# Altium PCB PCB File.PcbDoc
Units mm, origin at the board's own origin, x right, y up, seen from the top; angles counter-clockwise.
Board outline 82.74 x 78.96 mm, 2 copper layers (Top Layer, Bottom Layer); 26 components, 19 nets, 74 pads, 1 vias.
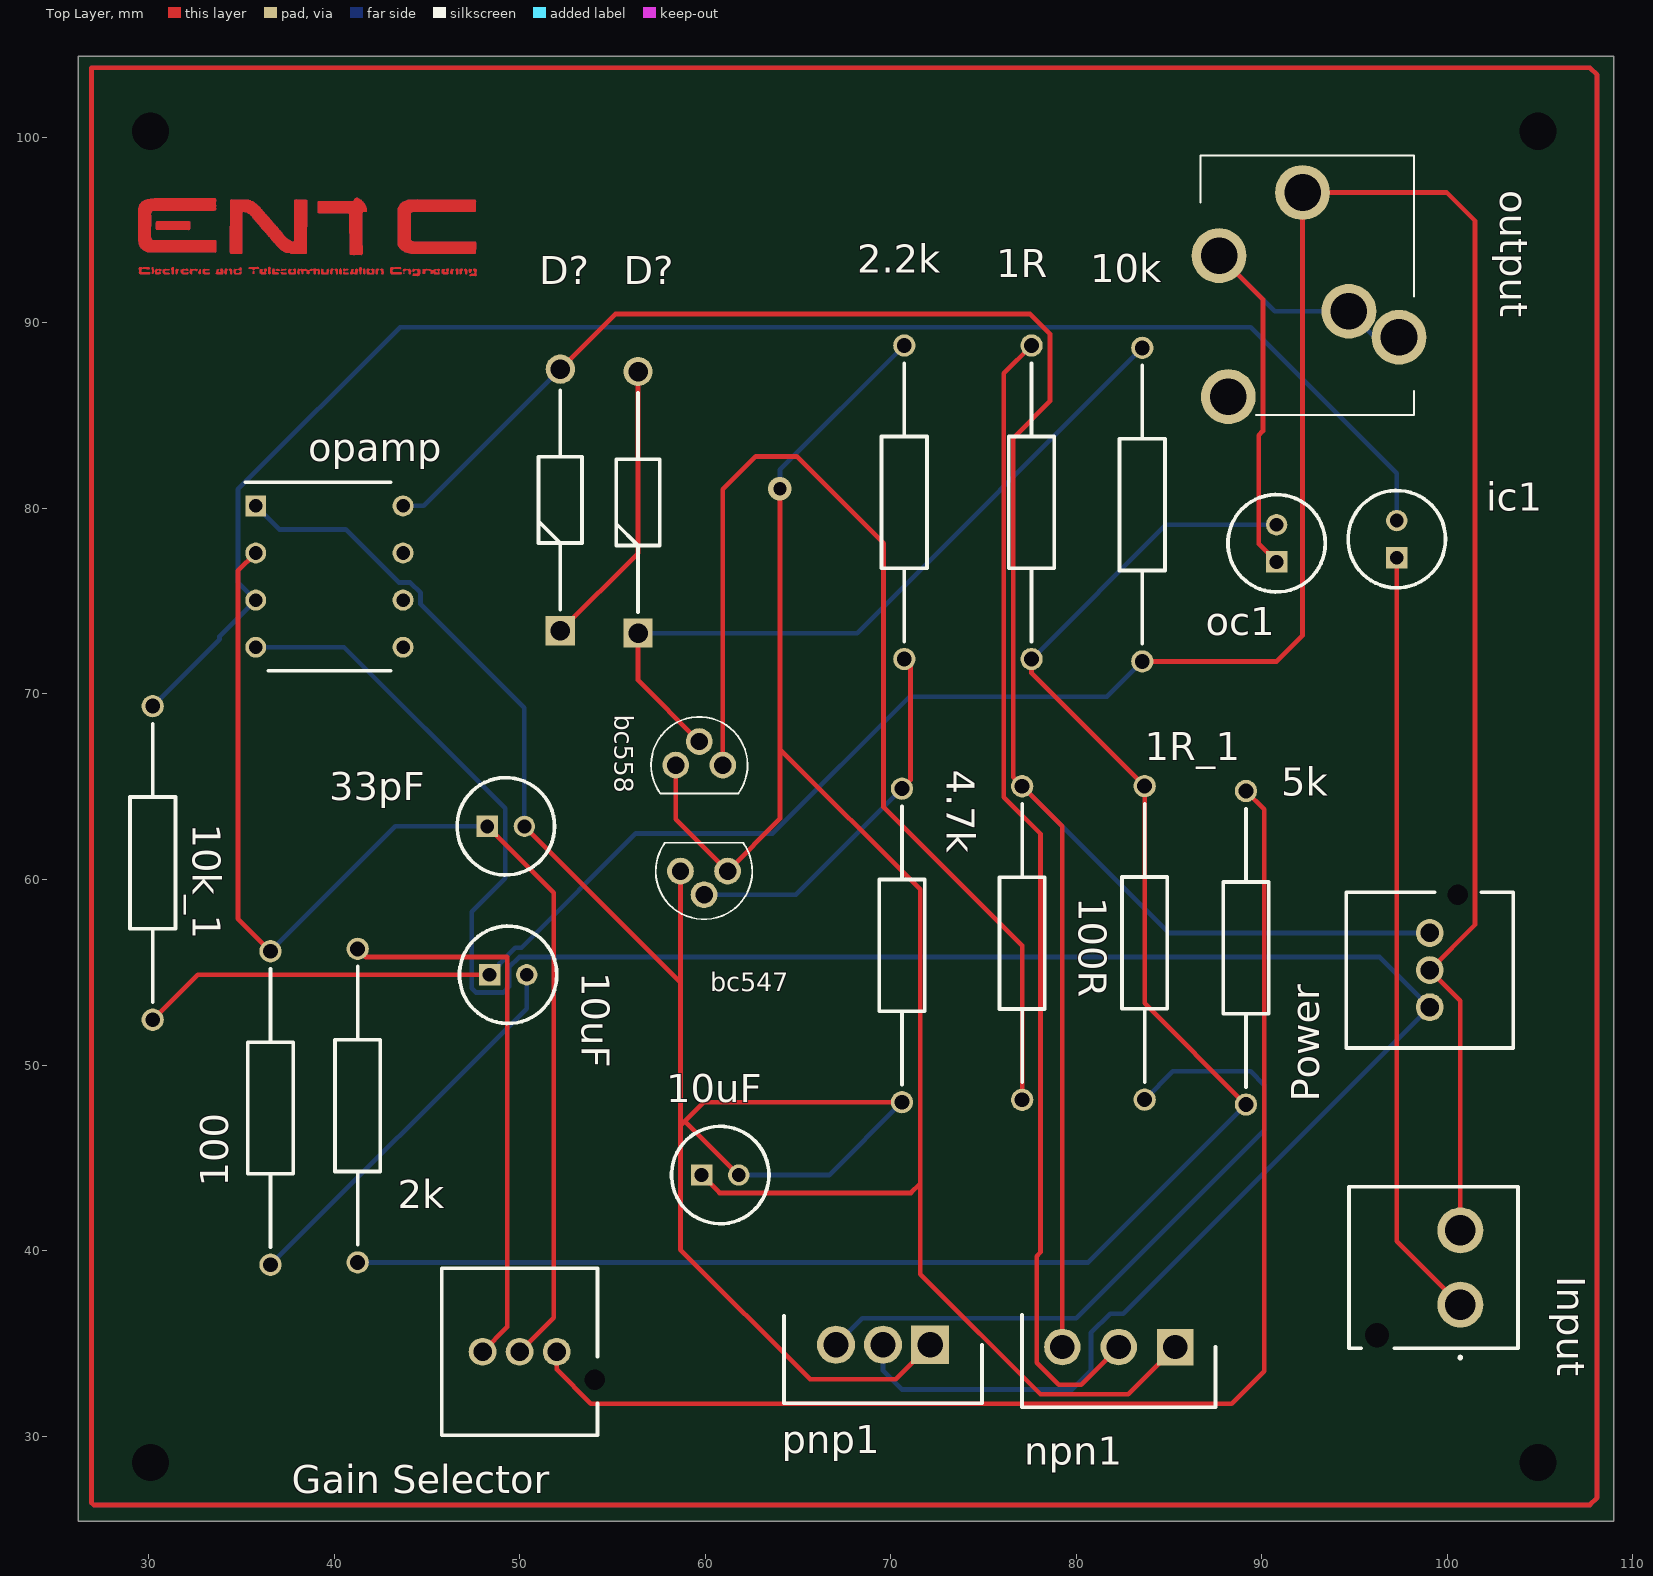
[diagram p0: Top Layer view]
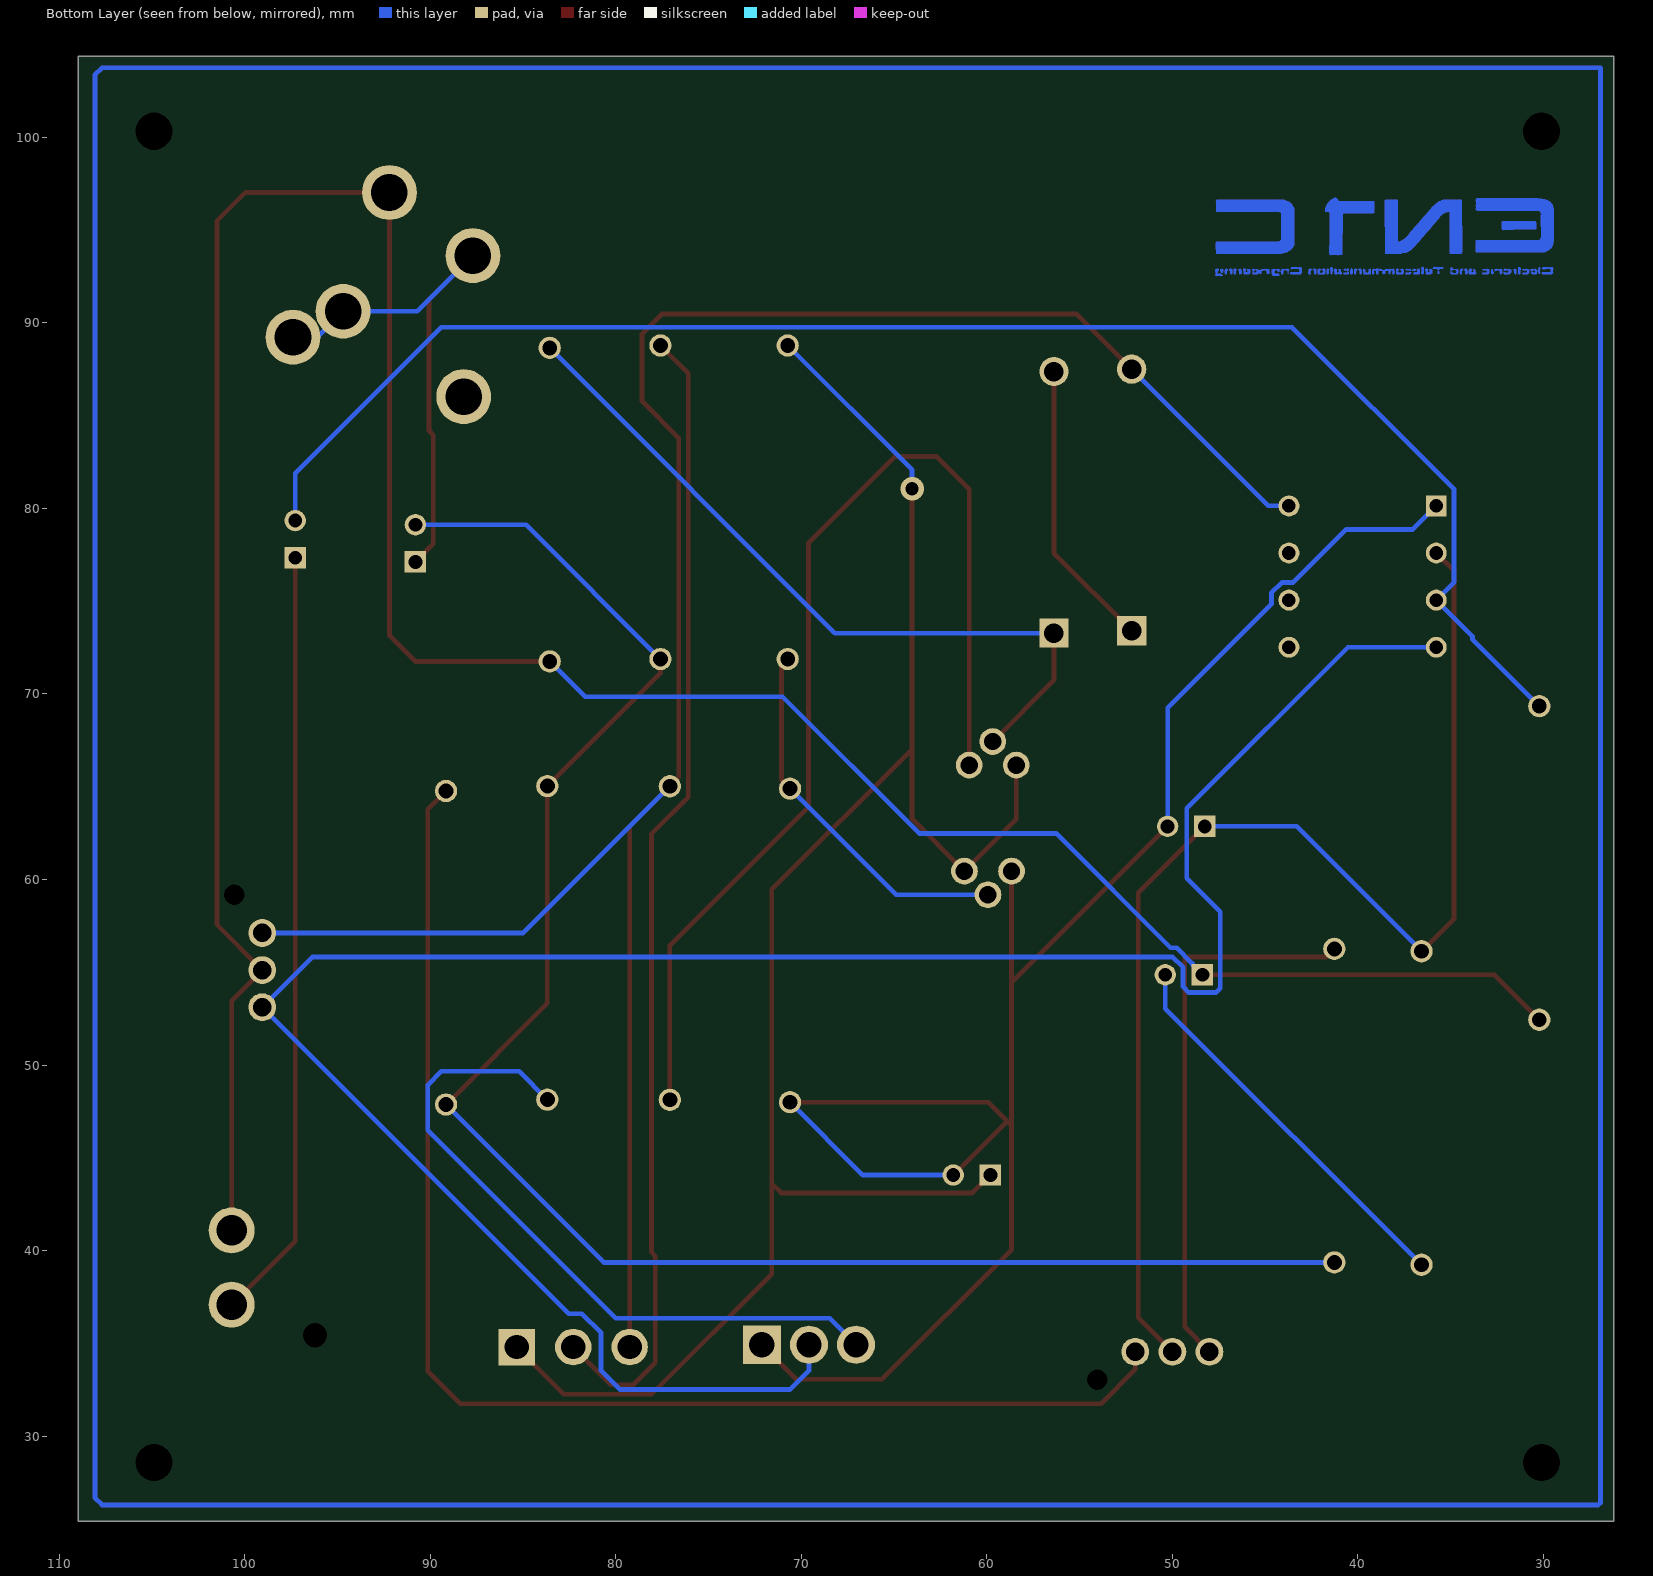
[diagram p1: Bottom Layer view, seen from below]
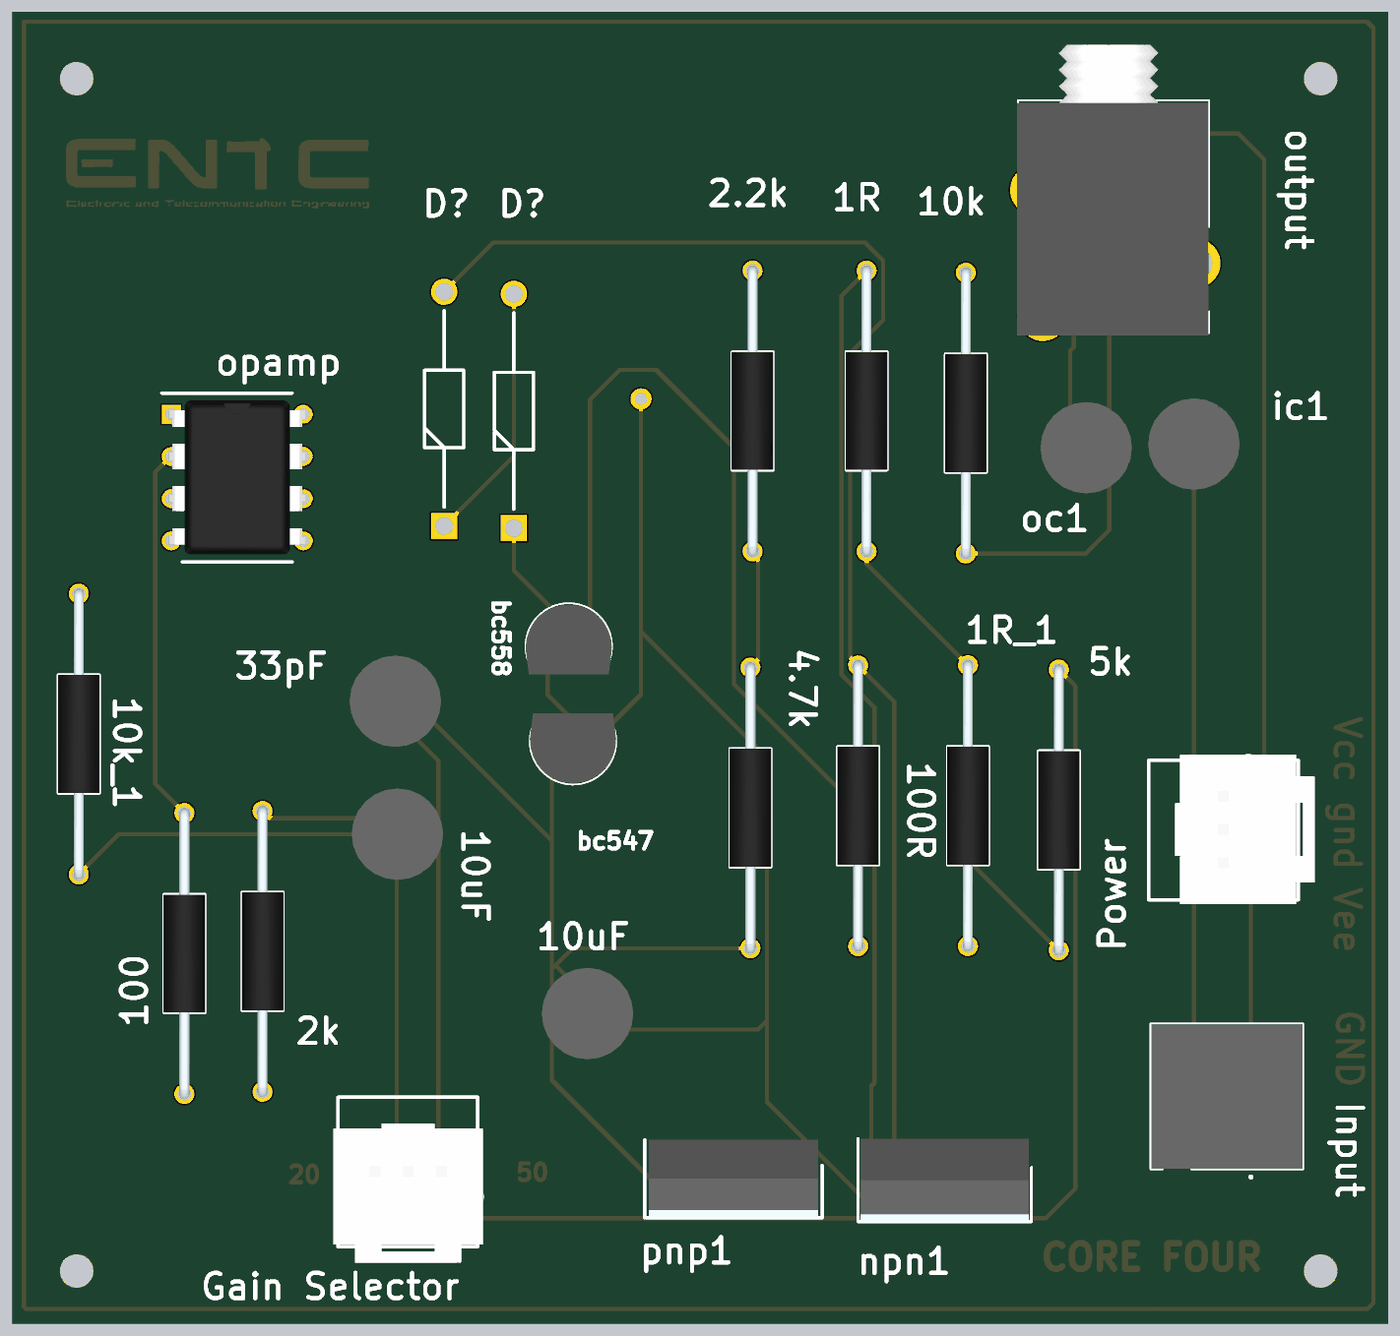
[diagram p2: 3D render of the assembled board from above, using the file's embedded part models]

## Layer stack, top to bottom
Top Solder: solder mask 0.0102, Solder Resist, Dk 3.5
Top Layer: signal copper 0.0356
Dielectric 1: dielectric 0.32, FR-4, Dk 4.8
Bottom Layer: signal copper 0.0356
Bottom Solder: solder mask 0.0102, Solder Resist, Dk 3.5

## Board outline
26.226,25.4 108.966,25.4 108.966,104.361 26.226,104.361

## Design rules (kind name [scope] priority, off if disabled: settings)
Clearance [All] p1: gap=0.254 ignorepadtopadclearanceinfootprint=FALSE except(0: Arc-Hole Track-Hole SMDPad-Hole THPad-Hole Via-Hole Fill-Hole Poly-Hole Region-Hole Text-Hole)
PolygonConnect [All] p1: connectstyle=Relief reliefconductorwidth=0.254 reliefentries=4 polygonreliefangle="90 Angle" airgapwidth=0.254
RoutingVias [All] p1: holewidth=0.711 width=1.27 viastyle="Through Hole" minholewidth=0.711 minwidth=1.27 maxholewidth=0.711 maxwidth=1.27
SolderMaskExpansion [All] p1: expansion=0.102 istentingtop=FALSE
Width [All] p1: maxlimit=0.254 minlimit=0.254 preferedwidth=0.254
30 further rules are at their usual default settings.

## Classes and differential pairs
component class Sheet1: 1R 1R_1 2.2k 2k 4.7k 5k 10k 10k_1 10uF 33pF 100 100R bc547 bc558 D? "Gain Selector" Input npn1 oc1 opamp output pnp1 Power

## Components (designator, comment, footprint, x,y, rotation, side; value= is the part's Value field where it differs from the comment)
1R "H810KBYA" RESAD1690W60L710D245 77.597,71.882 r90 top
1R_1 "H810KBYA" RESAD1690W60L710D245 83.693,48.133 r90 top
2.2k "H810KBYA" RESAD1690W60L710D245 70.739,71.882 r90 top
2k "H810KBYA" RESAD1690W60L710D245 41.275,39.361 r90 top
4.7k "H810KBYA" RESAD1690W60L710D245 70.612,47.997 r90 top
5k "H810KBYA" RESAD1690W60L710D245 89.154,47.87 r90 top
10k "H810KBYA" RESAD1690W60L710D245 83.566,71.755 r90 top
10k_1 "H810KBYA" RESAD1690W60L710D245 30.226,52.442 r90 top
10uF "ECA-1HHG100" CAPPRD200W55D525H1200 48.387,54.864 r0 top
10uF "ECA-1HHG100" CAPPRD200W55D525H1200 59.817,44.069 r0 top
33pF "ECA-1HHG100" CAPPRD200W55D525H1200 48.26,62.865 r0 top
100 "H810KBYA" RESAD1690W60L710D245 36.576,39.234 r90 top
100R "H810KBYA" RESAD1690W60L710D245 77.089,48.124 r90 top
bc547 "BC547BG" TO-92_(TO-226) 61.214,60.452 r0 top
bc558 "BC547BG" TO-92_(TO-226) 58.42,66.167 r180 top
D? "IN4007" DIOAD1405W86L465D235 52.197,73.406 r90 top
D? "IN4007" DIOAD1405W86L465D235 56.388,73.279 r90 top
"Gain Selector" "B03B-JWPF-SK-R_LF__SN_" B03BJWPFSKRLFSN 52.006,34.544 r180 top
ic1 "ECA-1HHG100" CAPPRD200W55D525H1200 97.282,77.343 r90 top
Input "B02B-PSIY-B1___LF__SN_" B02BPSIYB1LFSN 100.711,37.084 r270 top
npn1 "TIP41A" TO304P498X1010X2089-3P 85.336,34.798 r180 top
oc1 "ECA-1HHG100" CAPPRD200W55D525H1200 90.805,77.121 r90 top
opamp "NE5532P" DIP794W53P254L959H508Q8N 39.751,76.327 r0 top
output "35RAPC4BH3" 35RAPC4BH3 92.202,97.028 r270 top (schematic designator OUTPUT)
pnp1 "TIP42C" TO254P470X1016X2019-3P 72.126,34.925 r180 top
Power "B03B-JWPF-SK-R_LF__SN_" B03BJWPFSKRLFSN 99.06,57.118 r270 top

## Footprints (in the part's own frame and the unit in brackets; to place one, negate y for a bottom-side part, rotate by r counter-clockwise, add the part's x,y. Pads: shape width x height; smd on the part's side, far side on the other; paste and mask are expansions set on the pad)
35RAPC4BH3 [mm]
  round 2.955 hole 1.97: 1(0,0) 2(7.8,5.2) 3(6.4,2.5) 4(11,-4) 5(3.4,-4.5)
  silkscreen extent -2,-5.5 12,6, body extent -5.34,-5.55 12.16,5.95, height 6.1
B02BPSIYB1LFSN [mm]
  round 2.475 hole 1.65: 1(0,0) 2(-4,0)
  round 0.65 hole 1.3 unplated: MH1(1.65,-4.5)
  silkscreen extent -6.35,-6 2.9,3.1, body extent -6.35,-6 2.35,3.1, height 12.45
B03BJWPFSKRLFSN [mm]
  round 1.5 hole 1: 1(0,0) 2(2,0) 3(4,0)
  round 0.55 hole 1.1 unplated: MH1(-2.05,1.5)
  silkscreen extent -2.2,-4.5 6.2,4.5, body extent -2.53,-2.92 6.47,5.48, height 16.58
CAPPRD200W55D525H1200 [mm]
  rect 1.15x1.15 hole 0.75: 1(0,0)
  round 1.15 hole 0.75: 2(2,0)
  silkscreen extent -1.62,-2.62 3.63,2.62, body extent -1.74,-2.75 3.75,2.75, height 12
DIOAD1405W86L465D235 [mm]
  rect 1.575x1.575 hole 1.05: 1(0,0)
  round 1.575 hole 1.05: 2(14.1,0)
  silkscreen extent 1.14,-1.18 12.96,1.18, body extent 0,0 0,0
DIP794W53P254L959H508Q8N [mm]
  rect 1.13x1.13 hole 0.73: 1(-3.97,3.81)
  round 1.13 hole 0.73: 2(-3.97,1.27) 3(-3.97,-1.27) 4(-3.97,-3.81) 5(3.97,-3.81) 6(3.97,-1.27) 7(3.97,1.27) 8(3.97,3.81)
  silkscreen extent -4.54,-5.08 3.3,5.08, body extent -4.1,-4.64 4.1,4.64, height 4.21
RESAD1690W60L710D245 [mm]
  round 1.2 hole 0.8: 1(0,0) 2(16.9,0)
  silkscreen extent 0.95,-1.22 15.95,1.22, body extent -0.3,-1.24 17.2,1.24, height 2.5
TO254P470X1016X2019-3P [mm]
  rect 2.055x2.055 hole 1.37: 1(0,0)
  round 2.055 hole 1.37: 2(2.535,0) 3(5.07,0)
  silkscreen extent -2.8,-1.55 7.87,3.15, body extent -2.55,-1.55 7.61,3.15, height 18.54
TO304P498X1010X2089-3P [mm]
  rect 1.965x1.965 hole 1.31: 1(0,0)
  round 1.965 hole 1.31: 2(3.04,0) 3(6.08,0)
  silkscreen extent -2.17,-1.74 8.25,3.25, body extent -2.01,-1.74 8.09,3.24, height 19.12
TO-92_(TO-226) [mm]
  round 1.44 hole 0.94: 1(0,0) 2(-1.27,-1.27) 3(-2.54,0)
  silkscreen extent -3.87,-2.6 1.33,1.53, body extent -3.87,-2.51 1.33,1.68, height 8.33

## Part data
1R 1R_1 2.2k 2k 4.7k 5k 10k 10k_1 100 100R: "Resistor", Manufacturer_Name="TE Connectivity", Mouser Part Number=279-H810KBYA, Arrow Part Number=H810KBYA, Arrow Price/Stock=https://www.arrow.com/en/products/h810kbya/te-connectivity, Datasheet Link=https://datasheet.datasheetarchive.com/originals/distributors/DKDS-21/401710.pdf, Manufacturer_Part_Number=H810KBYA, Mouser Price/Stock=https://www.mouser.com/Search/Refine.aspx?Keyword=279-H810KBYA
10uF 10uF 33pF ic1 oc1: "Capacitor Polarised", Manufacturer_Name=Panasonic, Mouser Part Number=667-ECA-1HHG100, Arrow Part Number=ECA-1HHG100, Arrow Price/Stock=https://www.arrow.com/en/products/eca-1hhg100/panasonic?region=europe, Datasheet Link=http://industrial.panasonic.com/cdbs/www-data/pdf/RDF0000/ABA0000C1215.pdf, Height=12mm, Manufacturer_Part_Number=ECA-1HHG100, Mouser Price/Stock=https://www.mouser.co.uk/ProductDetail/Panasonic/ECA-1HHG100?qs=86KMePBwEH059%252B7I%2FwBMgA%3D%3D
bc547 bc558: "Transistor BJT NPN", Manufacturer_Name=onsemi, Mouser Part Number=N/A, Arrow Part Number=BC547BG, Arrow Price/Stock=http://www.arrow.com/en/products/bc547bg/on-semiconductor, Datasheet Link=https://datasheet.datasheetarchive.com/originals/distributors/Datasheets-23/DSA-455923.pdf, Height=5.33mm, Manufacturer_Part_Number=BC547BG, Mouser Price/Stock=http://www.mouser.com/Search/ProductDetail.aspx?qs=NSmgnqlvnz5NIKIycfR5CQ%3d%3d
D? D?: "Diode", Manufacturer_Name=onsemi, Manufacturer_Part_Number=IN4007
"Gain Selector" Power: "Connector", Manufacturer_Name="JST (JAPAN SOLDERLESS TERMINALS)", Manufacturer_Part_Number=B03B-JWPF-SK-R(LF)(SN), Datasheet Link=https://datasheet.datasheetarchive.com/originals/dk/DKDS-13/257039.pdf, Height=16.6mm
Input: "Connector", Manufacturer_Name="JST (JAPAN SOLDERLESS TERMINALS)", Manufacturer_Part_Number="B02B-PSIY-B1  (LF)(SN)", Datasheet Link=https://www.jst-mfg.com/product/pdf/eng/ePSI.pdf?60f75cd026c21, Height=12.35mm
npn1: "Transistor", Manufacturer_Name=MOSPEC, Datasheet Link=http://www.mospec.com.tw/pdf/power/TIP41.pdf, Height=4.98mm, Manufacturer_Part_Number=TIP41A
opamp: "Integrated Circuit", Manufacturer_Name="Texas Instruments", Mouser Part Number=595-NE5532P, Arrow Part Number=NE5532P, Arrow Price/Stock=https://www.arrow.com/en/products/ne5532p/texas-instruments?region=nac, Datasheet Link=http://www.ti.com/lit/ds/symlink/ne5532a.pdf, Height=5.08mm, Manufacturer_Part_Number=NE5532P, Mouser Price/Stock=https://www.mouser.co.uk/ProductDetail/Texas-Instruments/NE5532P?qs=3pnr37ZAbK%252Bre0OAHDmGsw%3D%3D
output: "Switch", Manufacturer_Name=Switchcraft, Mouser Part Number=502-35RAPC4BH3, Arrow Part Number=35RAPC4BH3, Arrow Price/Stock=https://www.arrow.com/en/products/35rapc4bh3/switchcraft, Datasheet Link=http://www.switchcraft.com/Drawings/35rapc__h3_cd.pdf, Height=6mm, Manufacturer_Part_Number=35RAPC4BH3, Mouser Price/Stock=https://www.mouser.co.uk/ProductDetail/Switchcraft/35RAPC4BH3?qs=I3kMT7EEIOWFGyk5rynRAQ%3D%3D
pnp1: "Transistor BJT PNP", Manufacturer_Name=onsemi, Mouser Part Number=512-TIP42C, Arrow Part Number=TIP42C, Arrow Price/Stock=https://www.arrow.com/en/products/tip42c/on-semiconductor, Datasheet Link=http://www.mouser.com/ds/2/149/TIP42C-890174.pdf, Height=4.7mm, Manufacturer_Part_Number=TIP42C, Mouser Price/Stock=https://www.mouser.co.uk/ProductDetail/onsemi-Fairchild/TIP42C?qs=cnIeywgme7b7B3r0xPyyBQ%3D%3D

## Free pads (board coordinates)
  round 1.524 hole 2: 8(104.902,100.33) 9(30.099,100.33) 10(104.902,28.575) 11(30.099,28.575)

## Via types
v1: diameter 1.27, hole 0.711, Top Layer to Bottom Layer, 1 vias

## Nets (pads, with @x,y where several pads share a name; then routed paths per layer and width w, separated by ;. In a path a pad name is that pad's centre, name@x,y a point inside that pad or via, vN(x,y) a via of type N, cw(c..) or ccw(c..) an arc to the next point about the centre after c; other vN are vias at no path point)
GND: 10k.1 10k_1.1 10uF.1@48.387,54.864 Input.2 output.1 Power.2 | length 160.5
  Top Layer w0.254: 10k_1.1 32.648,54.864 10uF.1@48.387,54.864 ; 10k.1 90.805,71.755 92.202,73.152 output.1 99.974,97.028 101.498,95.504 101.498,57.556 Power.2 100.711,53.467 Input.2
  Bottom Layer w0.254: 10uF.1@48.387,54.864 48.923,55.4 48.923,55.47 49.781,56.328 50.105,56.328 56.261,62.484 63.652,62.484 71.018,69.85 81.661,69.85 10k.1
input: ic1.1 Input.1 | length 41.7
  Top Layer w0.254: ic1.1 97.282,40.513 Input.1
Net1R_1: 1R.1 1R_1.2 2k.1 5k.1 oc1.2 | length 96.4
  Top Layer w0.254: 1R.1 77.597,71.129 1R_1.2 83.693,53.331 5k.1
  Bottom Layer w0.254: 2k.1 80.645,39.361 5k.1 ; 1R.1 84.836,79.121 oc1.2
Net1R_1_1: 1R_1.1 pnp1.3 | length 37.7
  Bottom Layer w0.254: pnp1.3 68.478,36.347 80.01,36.347 90.145,46.482 90.145,48.92 89.408,49.657 85.217,49.657 1R_1.1
Net1R_2: 1R.2 npn1.2 | length 62.1
  Top Layer w0.254: 1R.2 76.098,87.283 76.098,64.44 78.08,62.459 78.08,39.903 77.876,39.7 77.876,33.96 79.07,32.766 80.264,32.766 npn1.2
Net2.2k_1: 2.2k.1 4.7k.2 bc547.2 | length 20.3
  Top Layer w0.254: 4.7k.2 71.069,65.354 71.069,71.552 2.2k.1
  Bottom Layer w0.254: bc547.2 64.897,59.182 4.7k.2
Net2.2k_2: 2.2k.2 10uF.1@59.817,44.069 bc547.1 bc558.1 npn1.1 | length 100.4
  Top Layer w0.254: bc558.1 58.42,63.246 bc547.1 64.033,63.271 64.033,67.031 ; 10uF.1@59.817,44.069 60.782,43.104 71.095,43.104 71.603,43.612 ; v1(64.033,81.06) 64.033,67.031 ; npn1.1 82.796,32.258 78.08,32.258 71.603,38.735 71.603,43.612 ; 64.033,67.031 71.603,59.461 71.603,43.612
  Bottom Layer w0.254: v1(64.033,81.06) 64.033,82.076 2.2k.2
Net2k_2: 2k.2 "Gain Selector.3" | length 30.1
  Top Layer w0.254: 2k.2 41.716,55.82 49.343,55.82 49.343,35.881 48.006,34.544
Net4.7k_1: 4.7k.1 10uF.2@61.817,44.069 33pF.2 bc547.3 opamp.1 pnp1.1 | length 102.1
  Top Layer w0.254: 33pF.2 58.674,54.451 ; bc547.3 58.674,54.451 ; 10uF.2@61.817,44.069 58.912,46.974 ; 4.7k.1 59.935,47.997 58.912,46.974 ; pnp1.1 70.272,33.071 65.659,33.071 58.674,40.056 58.674,46.736 ; 58.674,46.736 58.674,54.451 ; 58.674,46.736 58.912,46.974
  Bottom Layer w0.254: opamp.1 37.051,78.867 40.64,78.867 43.504,76.003 44.113,76.003 44.667,75.449 44.667,74.84 50.26,69.247 33pF.2 ; 10uF.2@61.817,44.069 66.684,44.069 4.7k.1
Net5k_2: 5k.2 "Gain Selector.1" | length 72.3
  Top Layer w0.254: 52.006,34.544 52.006,33.592 53.848,31.75 88.392,31.75 90.145,33.503 90.145,63.779 5k.2
Net10k_1_2: 10k_1.2 ic1.2 opamp.3 | length 86.3
  Bottom Layer w0.254: 10k_1.2 33.833,72.949 33.833,73.109 opamp.3 34.823,76.015 34.823,81.026 43.561,89.764 89.408,89.764 97.282,81.89 ic1.2
Net10k_2: 10k.2 bc558.2 D?.1@56.388,73.279 | length 40.8
  Top Layer w0.254: D?.1@56.388,73.279 56.388,70.739 bc558.2
  Bottom Layer w0.254: D?.1@56.388,73.279 68.19,73.279 10k.2
Net10uF_2: 10uF.2@50.387,54.864 100.1 | length 21.4
  Bottom Layer w0.254: 100.1 50.387,53.045 10uF.2@50.387,54.864
Net33pF_1: 33pF.1 100.2 "Gain Selector.2" opamp.2 | length 67.6
  Top Layer w0.254: opamp.2 34.823,76.639 34.823,57.887 100.2 ; 33pF.1 51.851,59.274 51.851,36.389 50.006,34.544
  Bottom Layer w0.254: 100.2 43.307,62.865 33pF.1
Net100R_1: 100R.1 bc558.3 | length 59.3
  Top Layer w0.254: bc558.3 60.96,81.026 62.738,82.804 64.948,82.804 69.621,78.13 69.621,63.906 77.089,56.439 100R.1
NetD?_1: D?.1@52.197,73.406 D?.2@56.388,87.379 | length 15.7
  Top Layer w0.254: D?.1@52.197,73.406 56.388,77.597 D?.2@56.388,87.379
output: oc1.1 output.2 output.3 output.5 | length 29.5
  Top Layer w0.254: output.5 90.068,91.262 90.068,84.176 89.84,83.947 89.84,78.086 oc1.1
  Bottom Layer w0.254: output.5 90.702,90.628 output.3 96.102,89.228 output.2
VCC: 100R.2 D?.2@52.197,87.506 npn1.3 opamp.8 Power.1 | length 121.4
  Top Layer w0.254: D?.2@52.197,87.506 55.166,90.475 77.521,90.475 78.588,89.408 78.588,85.776 76.606,83.795 76.606,65.507 100R.2 79.256,62.857 npn1.3
  Bottom Layer w0.254: opamp.8 44.828,80.137 D?.2@52.197,87.506 ; 100R.2 84.995,57.118 Power.1
Vee: opamp.4 pnp1.2 Power.3 | length 122.7
  Bottom Layer w0.254: opamp.4 40.538,72.517 49.225,63.83 49.225,60.071 47.422,58.268 47.422,54.14 47.654,53.908 49.12,53.908 49.431,54.219 49.431,55.26 49.991,55.82 96.358,55.82 Power.3 82.543,36.601 81.839,36.601 80.797,35.56 80.797,33.528 79.781,32.512 70.607,32.512 69.591,33.528 pnp1.2
pads on no net: "Gain Selector.MH1" Input.MH1 opamp.5 opamp.6 opamp.7 output.4 Power.MH1

## Other copper
Multi-Layer:
  region: 47.276,92.736 47.261,92.792 47.271,92.864 47.307,92.91 47.419,92.9 47.435,92.884 47.424,92.843 47.358,92.705 47.296,92.715 47.281,92.731
  region: 32.82,92.838 32.815,92.741 32.825,92.71 32.815,92.649 32.769,92.634 32.728,92.644 32.708,92.664 32.692,92.669 32.682,92.71 32.692,92.731 32.723,92.802 32.733,92.843 32.764,92.894 32.8,92.9 32.815,92.884 32.825,92.843
  region: 40.202,92.761 40.212,92.72 40.202,92.649 40.176,92.623 40.125,92.634 40.11,92.649 40.099,92.69 40.11,92.731 40.099,92.782 40.079,92.802 40.069,92.823 40.038,92.853 40.043,92.889 40.063,92.9 40.094,92.91 40.135,92.92 40.186,92.9 40.202,92.884 40.212,92.843 40.202,92.772
  region: 43.757,92.654 43.741,92.669 43.752,92.72 43.767,92.726 43.793,92.71 43.798,92.674 43.787,92.654 43.767,92.654
  region: 46.601,92.634 46.585,92.649 46.575,92.69 46.585,92.761 46.57,92.818 46.565,92.884 46.601,92.92 46.662,92.91 46.688,92.884 46.698,92.813 46.703,92.674 46.688,92.639 46.672,92.623 46.637,92.618 46.606,92.628
  region: 37.276,92.71 37.419,92.7 37.439,92.68 37.429,92.628 37.383,92.613 37.291,92.623 37.26,92.613 37.178,92.623 37.153,92.649 37.132,92.72 37.148,92.736 37.24,92.726 37.271,92.715
  region: 36.907,92.802 36.877,92.833 36.872,92.859 36.892,92.889 36.964,92.91 37.035,92.9 37.051,92.884 37.071,92.833 37.066,92.807 37.025,92.797 36.912,92.797
  region: 37.184,92.802 37.168,92.797 37.143,92.813 37.153,92.874 37.189,92.91 37.347,92.905 37.393,92.91 37.429,92.884 37.419,92.853 37.404,92.838 37.296,92.843 37.209,92.807 37.189,92.807
  region: 40.708,92.91 40.759,92.9 40.774,92.884 40.764,92.853 40.749,92.838 40.641,92.843 40.606,92.818 40.555,92.787 40.514,92.797 40.498,92.843 40.509,92.884 40.534,92.91 40.575,92.92 40.647,92.9 40.698,92.91
  region: 46.176,92.669 46.166,92.649 46.14,92.623 46.002,92.628 45.915,92.623 45.885,92.634 45.818,92.669 45.808,92.71 45.798,92.853 45.834,92.889 45.874,92.9 45.956,92.889 45.982,92.864 45.972,92.833 45.941,92.782 45.951,92.751 45.967,92.736 46.007,92.726 46.059,92.736 46.084,92.751 46.074,92.792 46.053,92.813 46.033,92.853 46.079,92.91 46.12,92.92 46.171,92.91 46.186,92.894 46.197,92.853 46.186,92.813 46.166,92.792 46.156,92.772 46.146,92.741 46.176,92.68
  region: 29.69,92.623 29.557,92.613 29.506,92.644 29.49,92.69 29.48,92.741 29.49,92.772 29.485,92.94 29.495,92.981 29.516,93.002 29.557,93.012 29.639,93.002 29.679,92.981 29.71,92.992 30.053,92.997 30.073,92.946 30.063,92.915 30.048,92.9 30.007,92.889 29.905,92.9 29.72,92.91 29.669,92.93 29.613,92.874 29.603,92.833 29.613,92.761 29.649,92.726 29.905,92.736 30.068,92.726 30.084,92.71 30.094,92.669 30.078,92.634 30.027,92.613 29.802,92.623 29.7,92.623
  region: 42.667,92.853 42.672,92.664 42.647,92.628 42.58,92.623 42.555,92.649 42.56,92.767 42.519,92.828 42.493,92.853 42.498,92.889 42.519,92.9 42.549,92.91 42.59,92.92 42.642,92.9 42.657,92.884 42.667,92.864
  region: 36.467,92.802 36.457,92.905 36.467,92.986 36.483,93.012 36.524,93.022 36.56,93.007 36.58,92.935 36.575,92.838 36.58,92.68 36.549,92.628 36.503,92.613 36.467,92.639 36.457,92.68 36.467,92.792
  region: 42.365,92.644 42.335,92.613 42.284,92.623 42.258,92.649 42.248,92.69 42.258,92.874 42.304,92.92 42.386,92.91 42.432,92.874 42.422,92.853 42.376,92.797 42.36,92.751 42.37,92.68 42.37,92.649
  region: 39.608,92.823 39.598,92.853 39.629,92.905 39.685,92.91 39.721,92.874 39.731,92.813 39.721,92.782 39.7,92.659 39.685,92.634 39.613,92.613 39.572,92.623 39.393,92.618 39.352,92.628 39.322,92.659 39.301,92.741 39.312,92.884 39.337,92.91 39.409,92.9 39.424,92.853 39.419,92.777 39.439,92.726 39.511,92.695 39.562,92.705 39.598,92.741 39.608,92.782 39.608,92.813
  region: 40.37,92.93 40.396,92.905 40.416,92.823 40.406,92.659 40.381,92.623 40.34,92.613 40.289,92.644 40.278,92.685 40.273,92.69 40.283,92.72 40.294,92.792 40.289,92.859 40.299,92.9 40.324,92.935 40.36,92.94 40.365,92.935
  region: 31.567,92.731 31.557,92.639 31.531,92.613 31.49,92.623 31.465,92.649 31.46,92.705 31.465,92.782 31.454,92.813 31.465,92.874 31.49,92.9 31.531,92.91 31.613,92.9 31.639,92.874 31.593,92.818 31.567,92.761 31.567,92.741
  region: 33.864,92.838 33.859,92.864 33.905,92.91 33.966,92.92 34.012,92.884 34.022,92.843 34.017,92.736 34.022,92.68 33.992,92.628 33.946,92.613 33.884,92.623 33.854,92.634 33.669,92.623 33.634,92.659 33.644,92.731 33.674,92.802 33.685,92.874 33.731,92.889 33.792,92.879 33.807,92.864 33.797,92.833 33.756,92.792 33.767,92.751 33.823,92.726 33.874,92.736 33.889,92.751 33.879,92.813 33.869,92.833
  region: 40.785,92.669 40.774,92.639 40.759,92.623 40.718,92.613 40.626,92.623 40.595,92.613 40.524,92.623 40.509,92.639 40.498,92.68 40.509,92.731 40.524,92.746 40.549,92.751 40.636,92.705 40.667,92.695 40.698,92.705 40.769,92.695 40.785,92.68
  region: 34.36,92.833 34.339,92.874 34.375,92.91 34.447,92.92 34.498,92.889 34.503,92.792 34.493,92.761 34.513,92.68 34.488,92.634 34.447,92.623 34.411,92.649 34.416,92.756 34.38,92.813 34.365,92.828
  region: 35.966,92.946 35.941,92.92 35.767,92.91 35.664,92.848 35.634,92.859 35.593,92.9 35.572,92.91 35.542,92.92 35.409,92.93 35.393,92.976 35.429,93.012 35.567,93.007 35.767,93.012 35.797,93.002 35.869,93.012 35.9,93.022 35.951,92.992 35.966,92.956
  region: 35.623,92.756 35.649,92.792 35.664,92.797 35.69,92.772 35.71,92.72 35.7,92.659 35.654,92.644 35.623,92.654 35.608,92.7 35.618,92.751
  region: 30.672,92.9 30.687,92.884 30.677,92.823 30.626,92.772 30.636,92.731 30.656,92.71 30.667,92.669 30.662,92.644 30.59,92.623 30.559,92.634 30.462,92.618 30.447,92.613 30.416,92.623 30.396,92.634 30.37,92.659 30.36,92.731 30.37,92.761 30.36,92.782 30.35,92.813 30.36,92.853 30.406,92.9 30.447,92.91 30.518,92.879 30.559,92.889 30.61,92.91 30.621,92.91 hole: 30.539,92.828 30.498,92.818 30.472,92.792 30.483,92.751 30.508,92.736 30.518,92.736 30.58,92.746 30.585,92.782
  region: 41.572,92.884 41.583,92.905 41.608,92.93 41.649,92.92 41.665,92.905 41.675,92.864 41.685,92.792 41.675,92.639 41.659,92.623 41.619,92.613 41.583,92.639 41.572,92.7 41.583,92.731 41.572,92.823 41.562,92.853 41.567,92.879
  region: 31.373,92.915 31.362,92.69 31.352,92.639 31.327,92.613 31.286,92.623 31.26,92.649 31.25,92.751 31.24,92.935 31.281,93.007 31.337,93.012 31.362,92.986 31.373,92.946 31.373,92.925
  region: 34.237,92.813 34.217,92.761 34.206,92.639 34.191,92.623 34.15,92.613 34.104,92.649 34.094,92.69 34.104,92.864 34.14,92.91 34.181,92.92 34.232,92.91 34.278,92.874 34.247,92.823 34.242,92.818
  region: 41.414,92.613 41.388,92.639 41.378,92.68 41.368,92.864 41.358,92.894 41.368,92.935 41.383,92.992 41.404,93.012 41.465,93.002 41.48,92.986 41.491,92.946 41.501,92.874 41.491,92.843 41.48,92.772 41.47,92.639 41.445,92.613 41.424,92.613
  region: 46.872,92.71 46.882,92.68 46.872,92.639 46.826,92.623 46.795,92.634 46.77,92.659 46.775,92.787 46.759,92.843 46.785,92.9 46.836,92.92 46.908,92.91 46.944,92.884 46.933,92.843 46.903,92.813 46.892,92.792 46.872,92.772 46.872,92.72
  region: 43.358,92.992 43.588,92.997 43.608,92.986 43.613,92.94 43.583,92.9 43.255,92.91 43.225,92.92 43.168,92.874 43.128,92.813 43.158,92.761 43.184,92.736 43.225,92.726 43.388,92.736 43.624,92.726 43.649,92.7 43.639,92.649 43.624,92.634 43.542,92.613 43.501,92.623 43.087,92.618 43.051,92.644 43.035,92.69 43.041,92.848 43.03,92.9 43.025,92.946 43.056,92.997 43.071,93.012 43.194,93.002 43.245,92.981 43.276,92.992 43.347,92.992
  region: 43.997,92.813 43.992,92.828 43.972,92.838 43.92,92.859 43.823,92.792 43.767,92.767 43.746,92.777 43.721,92.802 43.711,92.843 43.741,92.894 43.808,92.92 43.839,92.91 43.91,92.889 44.007,92.905 44.053,92.91 44.125,92.869 44.151,92.802 44.14,92.659 44.105,92.623 44.064,92.613 44.028,92.639 44.018,92.68 44.028,92.772 44.002,92.807
  region: 39.915,92.731 39.905,92.639 39.89,92.623 39.849,92.613 39.803,92.649 39.792,92.731 39.803,92.761 39.813,92.884 39.838,92.91 39.879,92.92 39.93,92.91 39.977,92.874 39.966,92.853 39.915,92.782 39.915,92.741
  region: 30.309,92.751 30.293,92.695 30.268,92.659 30.252,92.644 30.201,92.654 30.186,92.669 30.196,92.772 30.206,92.802 30.196,92.864 30.186,92.894 30.176,92.935 30.186,92.976 30.211,93.002 30.252,92.992 30.268,92.976 30.288,92.833 30.309,92.782 30.309,92.761
  region: 47.542,92.91 47.614,92.92 47.665,92.889 47.68,92.874 47.675,92.685 47.68,92.577 47.655,92.531 47.614,92.521 47.522,92.531 47.501,92.552 47.409,92.541 47.358,92.521 47.307,92.531 47.291,92.577 47.337,92.634 47.389,92.654 47.47,92.644 47.501,92.634 47.557,92.68 47.578,92.741 47.537,92.813 47.516,92.833 47.506,92.874 47.516,92.894 47.537,92.905
  region: 41.803,92.91 41.874,92.92 41.941,92.884 41.931,92.853 41.89,92.813 41.869,92.761 41.915,92.705 41.966,92.685 42.033,92.71 42.074,92.751 42.064,92.792 42.043,92.813 42.033,92.833 41.992,92.874 41.997,92.889 42.048,92.91 42.089,92.92 42.145,92.905 42.166,92.884 42.176,92.843 42.166,92.669 42.13,92.623 42.058,92.613 42.018,92.623 41.828,92.618 41.792,92.634 41.777,92.68 41.767,92.751 41.777,92.884 41.798,92.905
  region: 31.751,92.864 31.818,92.889 31.899,92.91 32.012,92.9 32.043,92.91 32.089,92.915 32.125,92.9 32.15,92.874 32.14,92.813 32.073,92.807 31.981,92.848 31.91,92.838 31.874,92.802 31.864,92.761 31.889,92.715 31.961,92.695 32.022,92.705 32.094,92.736 32.135,92.726 32.15,92.68 32.14,92.639 32.125,92.623 32.084,92.613 31.956,92.618 31.889,92.613 31.859,92.623 31.787,92.664 31.772,92.68 31.751,92.731 31.741,92.833 31.746,92.859
  region: 30.856,92.634 30.779,92.69 30.759,92.772 30.769,92.853 30.784,92.869 30.836,92.889 30.917,92.91 31.112,92.9 31.132,92.889 31.148,92.874 31.132,92.848 31.061,92.838 31.02,92.848 30.922,92.833 30.892,92.813 30.882,92.772 30.892,92.731 30.917,92.705 31.004,92.7 31.066,92.71 31.091,92.715 31.142,92.685 31.148,92.639 31.132,92.623 31.091,92.613 30.989,92.623 30.958,92.613 30.876,92.623 30.866,92.634
  region: 32.212,92.792 32.263,92.884 32.288,92.91 32.411,92.9 32.442,92.889 32.513,92.9 32.544,92.91 32.616,92.9 32.651,92.864 32.641,92.802 32.595,92.787 32.462,92.848 32.411,92.838 32.355,92.792 32.345,92.751 32.355,92.68 32.345,92.639 32.329,92.623 32.298,92.613 32.247,92.644 32.222,92.71 32.212,92.751 32.212,92.782
  region: 36.882,92.634 36.779,92.623 36.749,92.613 36.698,92.623 36.672,92.649 36.662,92.71 36.672,92.741 36.662,92.864 36.698,92.91 36.739,92.92 36.779,92.91 36.815,92.874 36.82,92.848 36.785,92.761 36.82,92.726 36.933,92.736 37.005,92.695 37.02,92.68 37.01,92.659 36.984,92.634 36.892,92.634
  region: 45.701,92.889 45.706,92.833 45.654,92.761 45.695,92.669 45.67,92.634 45.629,92.623 45.537,92.634 45.506,92.623 45.414,92.634 45.363,92.685 45.322,92.674 45.302,92.654 45.261,92.644 45.22,92.654 45.204,92.669 45.215,92.731 45.225,92.761 45.215,92.792 45.133,92.813 45.066,92.838 44.995,92.828 44.923,92.787 44.908,92.772 44.913,92.674 44.892,92.644 44.78,92.654 44.764,92.7 44.775,92.741 44.775,92.751 44.77,92.859 44.79,92.879 44.903,92.889 44.933,92.9 44.974,92.91 45.015,92.9 45.184,92.905 45.235,92.874 45.245,92.853 45.271,92.828 45.332,92.838 45.363,92.869 45.435,92.9 45.506,92.889 45.547,92.869 45.568,92.889 45.588,92.9 45.649,92.92 hole: 45.547,92.838 45.496,92.807 45.47,92.782 45.475,92.756 45.527,92.736 45.583,92.741 45.588,92.746 45.603,92.761 45.593,92.782
  region: 36.145,92.736 36.186,92.726 36.237,92.736 36.263,92.751 36.253,92.792 36.232,92.813 36.212,92.853 36.258,92.91 36.299,92.92 36.35,92.91 36.365,92.894 36.375,92.853 36.365,92.813 36.334,92.782 36.324,92.741 36.355,92.669 36.345,92.649 36.319,92.623 36.181,92.628 36.084,92.623 36.012,92.664 35.997,92.68 35.987,92.751 35.997,92.874 36.012,92.889 36.084,92.9 36.145,92.889 36.171,92.864 36.161,92.843 36.12,92.782 36.13,92.751 36.14,92.741
  region: 41.235,92.618 41.179,92.613 41.127,92.634 41.087,92.644 40.974,92.613 40.902,92.623 40.887,92.639 40.877,92.68 40.887,92.72 40.918,92.792 40.928,92.874 40.943,92.889 41.035,92.879 41.051,92.864 41.04,92.823 41.02,92.802 41.03,92.751 41.076,92.705 41.117,92.715 41.143,92.741 41.153,92.782 41.133,92.853 41.143,92.884 41.158,92.9 41.199,92.91 41.225,92.915 41.276,92.894 41.296,92.874 41.286,92.792 41.276,92.761 41.266,92.639 41.25,92.623 41.24,92.623
  region: 35.004,92.976 35.025,92.925 35.01,92.807 35.004,92.741 35.015,92.71 35.004,92.649 34.979,92.623 34.938,92.613 34.764,92.623 34.744,92.613 34.713,92.623 34.652,92.634 34.616,92.659 34.595,92.71 34.605,92.864 34.611,92.869 34.652,92.91 34.774,92.9 34.805,92.889 34.856,92.9 34.877,92.92 34.897,92.93 34.912,92.946 34.923,92.966 34.938,92.981 34.979,92.992 hole: 34.805,92.859 34.754,92.848 34.728,92.823 34.708,92.772 34.718,92.731 34.744,92.705 34.785,92.695 34.856,92.705 34.923,92.751 34.928,92.756 34.943,92.761 34.938,92.797 34.918,92.807
  region: 29.485,94.23 29.475,94.291 29.465,94.342 29.444,94.424 29.439,94.552 29.449,94.562 29.439,94.593 29.449,96.117 29.46,96.148 29.48,96.23 29.495,96.317 29.516,96.368 29.531,96.383 29.536,96.398 29.557,96.409 29.582,96.434 29.592,96.455 29.644,96.526 29.7,96.552 29.72,96.562 29.777,96.608 29.792,96.623 29.864,96.644 29.935,96.654 30.104,96.69 30.165,96.7 30.309,96.71 33.393,96.716 33.424,96.705 33.557,96.716 33.598,96.705 33.623,96.68 33.644,96.608 33.639,96.439 33.644,96.281 33.634,96.25 33.644,96.117 33.634,96.076 33.618,96.061 33.547,96.04 33.383,96.051 30.222,96.04 30.196,96.015 30.135,95.882 30.14,95.774 30.135,94.623 30.145,94.593 30.171,94.526 30.196,94.49 30.263,94.465 30.334,94.455 33.572,94.46 33.613,94.449 33.644,94.419 33.654,94.378 33.649,93.964 33.659,93.912 33.664,93.846 33.639,93.81 33.588,93.79 30.017,93.8 29.986,93.81 29.945,93.82 29.833,93.871 29.761,93.892 29.71,93.923 29.659,93.974 29.639,93.984 29.592,94.02 29.552,94.091 29.531,94.102 29.521,94.122 29.49,94.194 29.49,94.224
  region: 31.613,95.017 30.452,95.012 30.416,95.027 30.39,95.084 30.385,95.406 30.406,95.457 30.457,95.478 30.743,95.467 32.201,95.473 32.252,95.442 32.263,95.401 32.252,95.258 32.263,95.227 32.252,95.063 32.217,95.017 32.176,95.007 32.043,95.017 31.623,95.017
  region: 44.248,92.603 44.309,92.664 44.391,92.654 44.422,92.644 44.473,92.654 44.498,92.68 44.509,92.72 44.498,92.792 44.452,92.848 44.422,92.859 44.391,92.848 44.314,92.772 44.304,92.751 44.258,92.746 44.222,92.782 44.232,92.874 44.248,92.9 44.289,92.91 44.371,92.9 44.422,92.879 44.473,92.9 44.565,92.91 44.637,92.869 44.647,92.828 44.652,92.69 44.642,92.659 44.631,92.618 44.606,92.552 44.585,92.531 44.514,92.521 44.457,92.536 44.36,92.541 44.33,92.531 44.248,92.541 44.232,92.557 44.243,92.598
  region: 39.209,92.894 39.23,92.843 39.219,92.639 39.204,92.623 39.143,92.634 39.127,92.68 39.138,92.772 39.092,92.828 39.061,92.838 39.035,92.813 39.015,92.761 39.025,92.659 38.999,92.623 38.959,92.613 38.938,92.623 38.913,92.649 38.918,92.777 38.877,92.828 38.805,92.818 38.754,92.797 38.677,92.802 38.667,92.772 38.687,92.7 38.677,92.669 38.662,92.654 38.611,92.634 38.549,92.644 38.534,92.659 38.539,92.787 38.488,92.807 38.447,92.818 38.375,92.807 38.35,92.782 38.34,92.741 38.35,92.7 38.34,92.649 38.324,92.634 38.268,92.639 38.258,92.68 38.248,92.792 38.212,92.838 38.171,92.828 38.155,92.813 38.135,92.761 38.14,92.664 38.125,92.628 38.079,92.613 38.043,92.639 38.022,92.71 38.033,92.864 38.069,92.91 38.109,92.92 38.166,92.905 38.212,92.889 38.263,92.91 38.401,92.905 38.488,92.91 38.56,92.869 38.631,92.838 38.672,92.848 38.723,92.9 38.795,92.91 38.887,92.9 38.918,92.91 38.989,92.92 39.02,92.91 39.061,92.9 39.163,92.92 39.204,92.9
  region: 46.279,92.772 46.289,92.843 46.299,92.874 46.335,92.91 46.437,92.9 46.463,92.874 46.452,92.853 46.401,92.782 46.391,92.639 46.376,92.623 46.335,92.613 46.289,92.639 46.279,92.68 46.279,92.761
  region: 46.478,93.728 44.125,93.738 44.094,93.749 44.028,93.764 43.977,93.774 43.915,93.784 43.818,93.8 43.746,93.851 43.654,93.902 43.537,94.02 43.527,94.061 43.496,94.112 43.475,94.132 43.445,94.204 43.434,94.398 43.445,96.189 43.486,96.26 43.506,96.281 43.516,96.301 43.547,96.373 43.557,96.393 43.573,96.419 43.593,96.429 43.649,96.475 43.706,96.531 43.777,96.552 43.859,96.583 43.91,96.613 43.982,96.634 44.084,96.644 44.493,96.654 47.614,96.644 47.649,96.608 47.66,96.547 47.649,96.516 47.639,96.015 47.614,95.989 47.573,95.979 47.44,95.989 44.258,95.979 44.207,95.958 44.151,95.933 44.13,95.882 44.14,94.48 44.186,94.424 44.207,94.414 44.258,94.393 47.644,94.383 47.67,94.327 47.66,94.132 47.649,93.754 47.624,93.728 47.583,93.718 47.481,93.728 46.488,93.728
  region: 33.107,92.848 33.076,92.838 33.05,92.813 33.04,92.772 33.05,92.731 33.076,92.705 33.148,92.695 33.178,92.705 33.291,92.695 33.306,92.68 33.296,92.639 33.281,92.623 33.209,92.613 33.004,92.623 32.953,92.654 32.938,92.669 32.917,92.72 32.928,92.864 32.963,92.9 33.035,92.91 33.137,92.9 33.245,92.905 33.281,92.889 33.286,92.864 33.27,92.848 33.229,92.838 33.117,92.848
  region: 169 vertices and 0 holes, not listed, extent 34.391,93.718 38.549,96.654
  region: 47.077,92.915 47.112,92.92 47.163,92.889 47.179,92.843 47.184,92.664 47.153,92.623 47.112,92.613 47.077,92.639 47.066,92.68 47.071,92.767 47.02,92.848 47.015,92.884 47.03,92.9 47.071,92.91
  region: 37.843,92.736 37.859,92.772 37.813,92.828 37.767,92.874 37.792,92.9 37.864,92.92 37.915,92.91 37.941,92.884 37.951,92.843 37.941,92.68 37.93,92.639 37.915,92.623 37.874,92.613 37.68,92.623 37.577,92.634 37.552,92.659 37.542,92.7 37.537,92.848 37.552,92.884 37.577,92.91 37.7,92.9 37.726,92.874 37.675,92.823 37.654,92.772 37.664,92.731 37.7,92.695 37.756,92.69 37.797,92.7 37.813,92.715 37.833,92.726 37.838,92.731
  region: 41.532,94.634 41.537,93.728 41.521,93.692 41.496,93.667 41.455,93.657 41.286,93.662 41.087,93.657 41.066,93.667 41.035,93.657 40.872,93.667 40.846,93.692 40.836,93.764 40.826,95.851 40.805,95.872 40.8,95.887 40.78,95.897 40.728,95.918 40.56,95.912 39.439,95.918 39.409,95.907 39.306,95.918 39.23,95.902 39.184,95.897 39.127,95.943 39.117,96.015 39.127,96.526 39.163,96.562 39.48,96.552 40.928,96.557 41.025,96.552 41.071,96.588 41.102,96.659 41.143,96.731 41.199,96.756 41.291,96.746 41.347,96.7 41.363,96.685 41.383,96.675 41.455,96.634 41.547,96.542 41.567,96.531 41.608,96.47 41.665,96.414 41.705,96.301 41.746,96.24 41.767,96.168 41.777,96.097 41.767,96.015 41.752,95.989 41.711,95.979 41.603,95.984 41.552,95.953 41.542,95.933 41.532,95.902 41.526,95.856 41.532,94.644
  lines w0.254: 26.924,26.416 26.924,103.759 107.696,103.759 108.077,103.378 108.077,26.67 107.696,26.289 27.051,26.289 26.924,26.416
  text "Vcc" at 105.791,62.103 h1.52 r270
  text "gnd" at 105.791,57.023 h1.52 r270
  text "Vee" at 105.791,51.816 h1.52 r270
  text "GND" at 105.918,44.45 h1.52 r270
  text "50" at 56.388,34.036 h1
  text "20" at 42.672,33.909 h1
  text "CORE FOUR" at 85.917,26.67 h1.52